# Altium PCB PLACALDR.PcbDoc
Units mm, origin at the board's own origin, x right, y up, seen from the top; angles counter-clockwise.
Board outline 60 x 50 mm, 2 copper layers (Top Layer, Bottom Layer); 18 components, 14 nets, 69 pads, 0 vias.
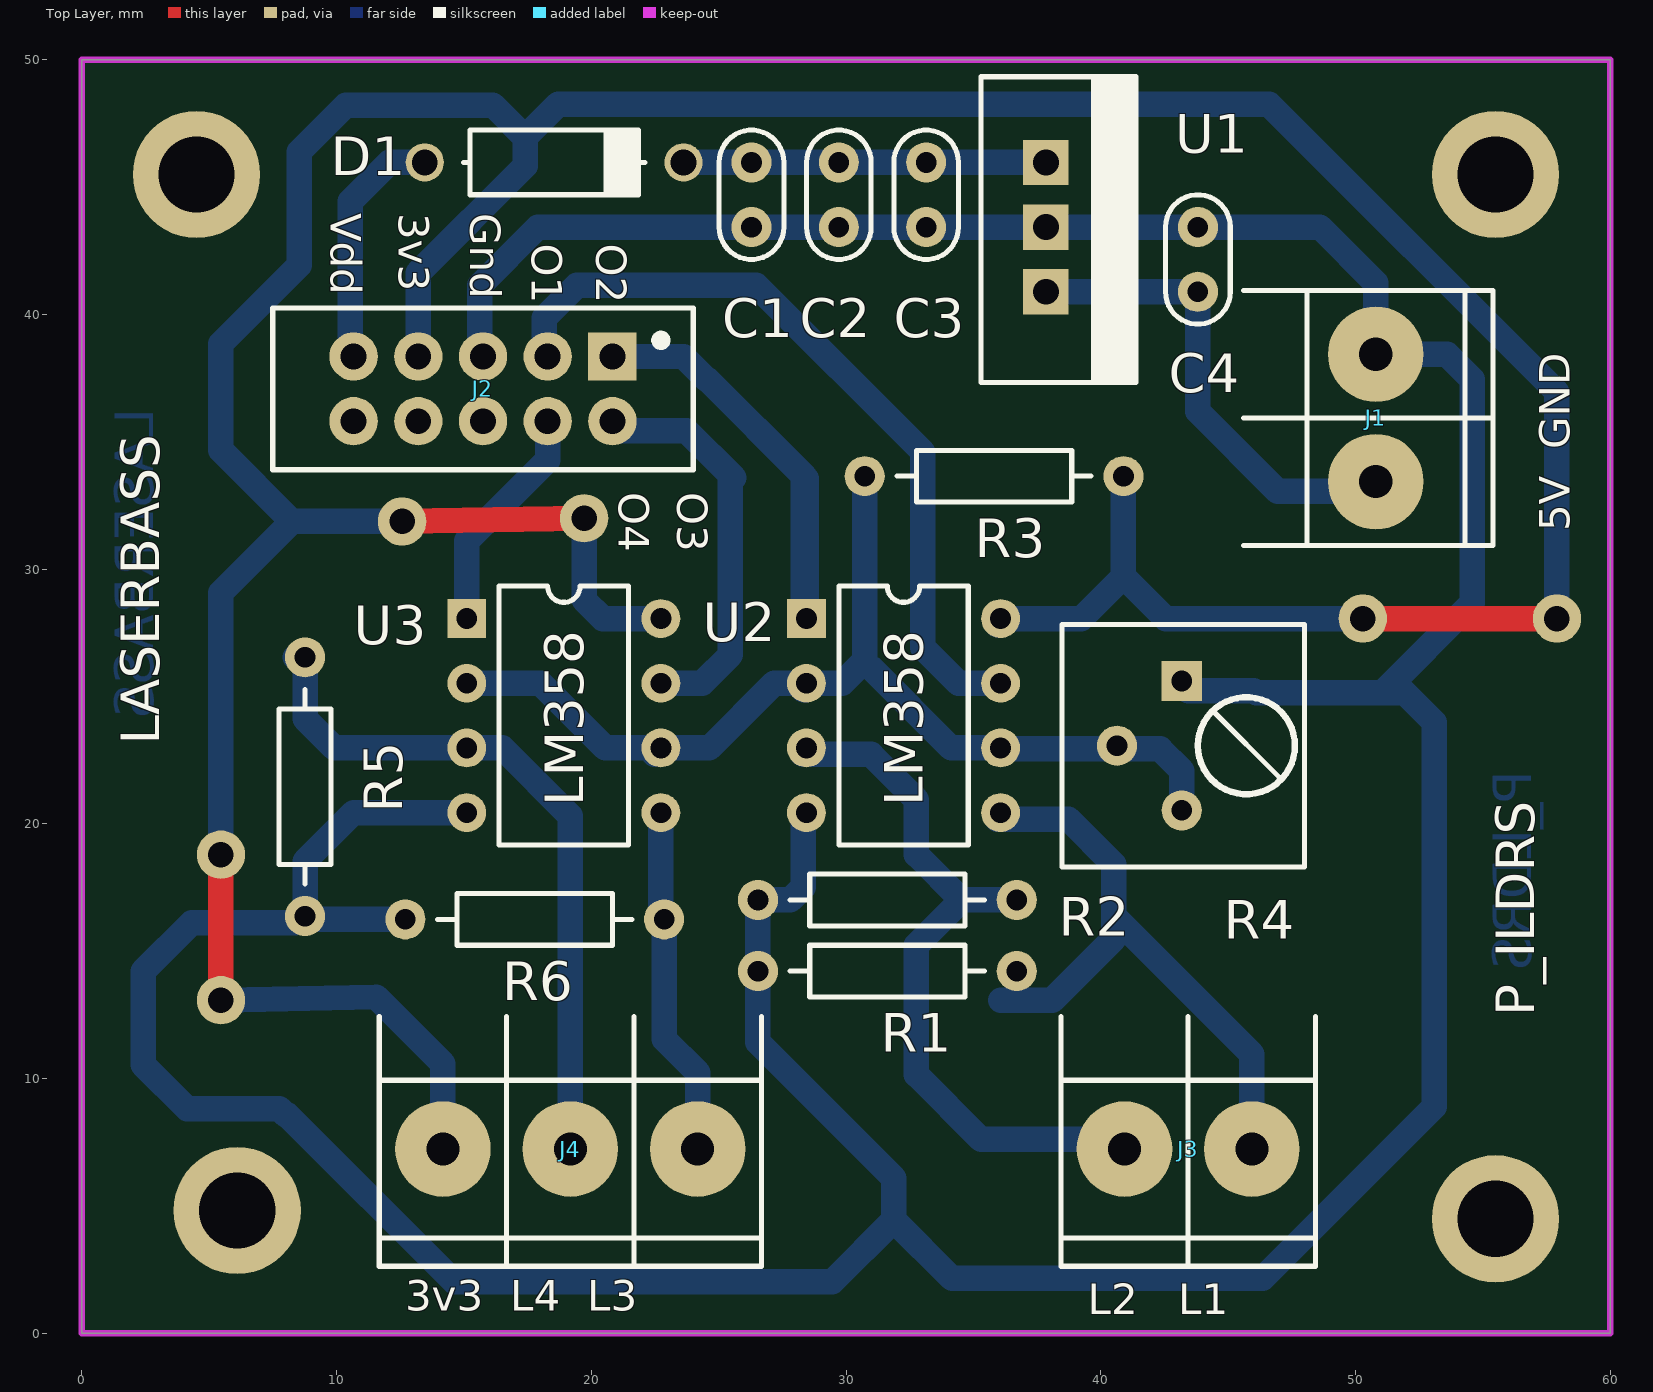
[diagram p0: Top Layer view]
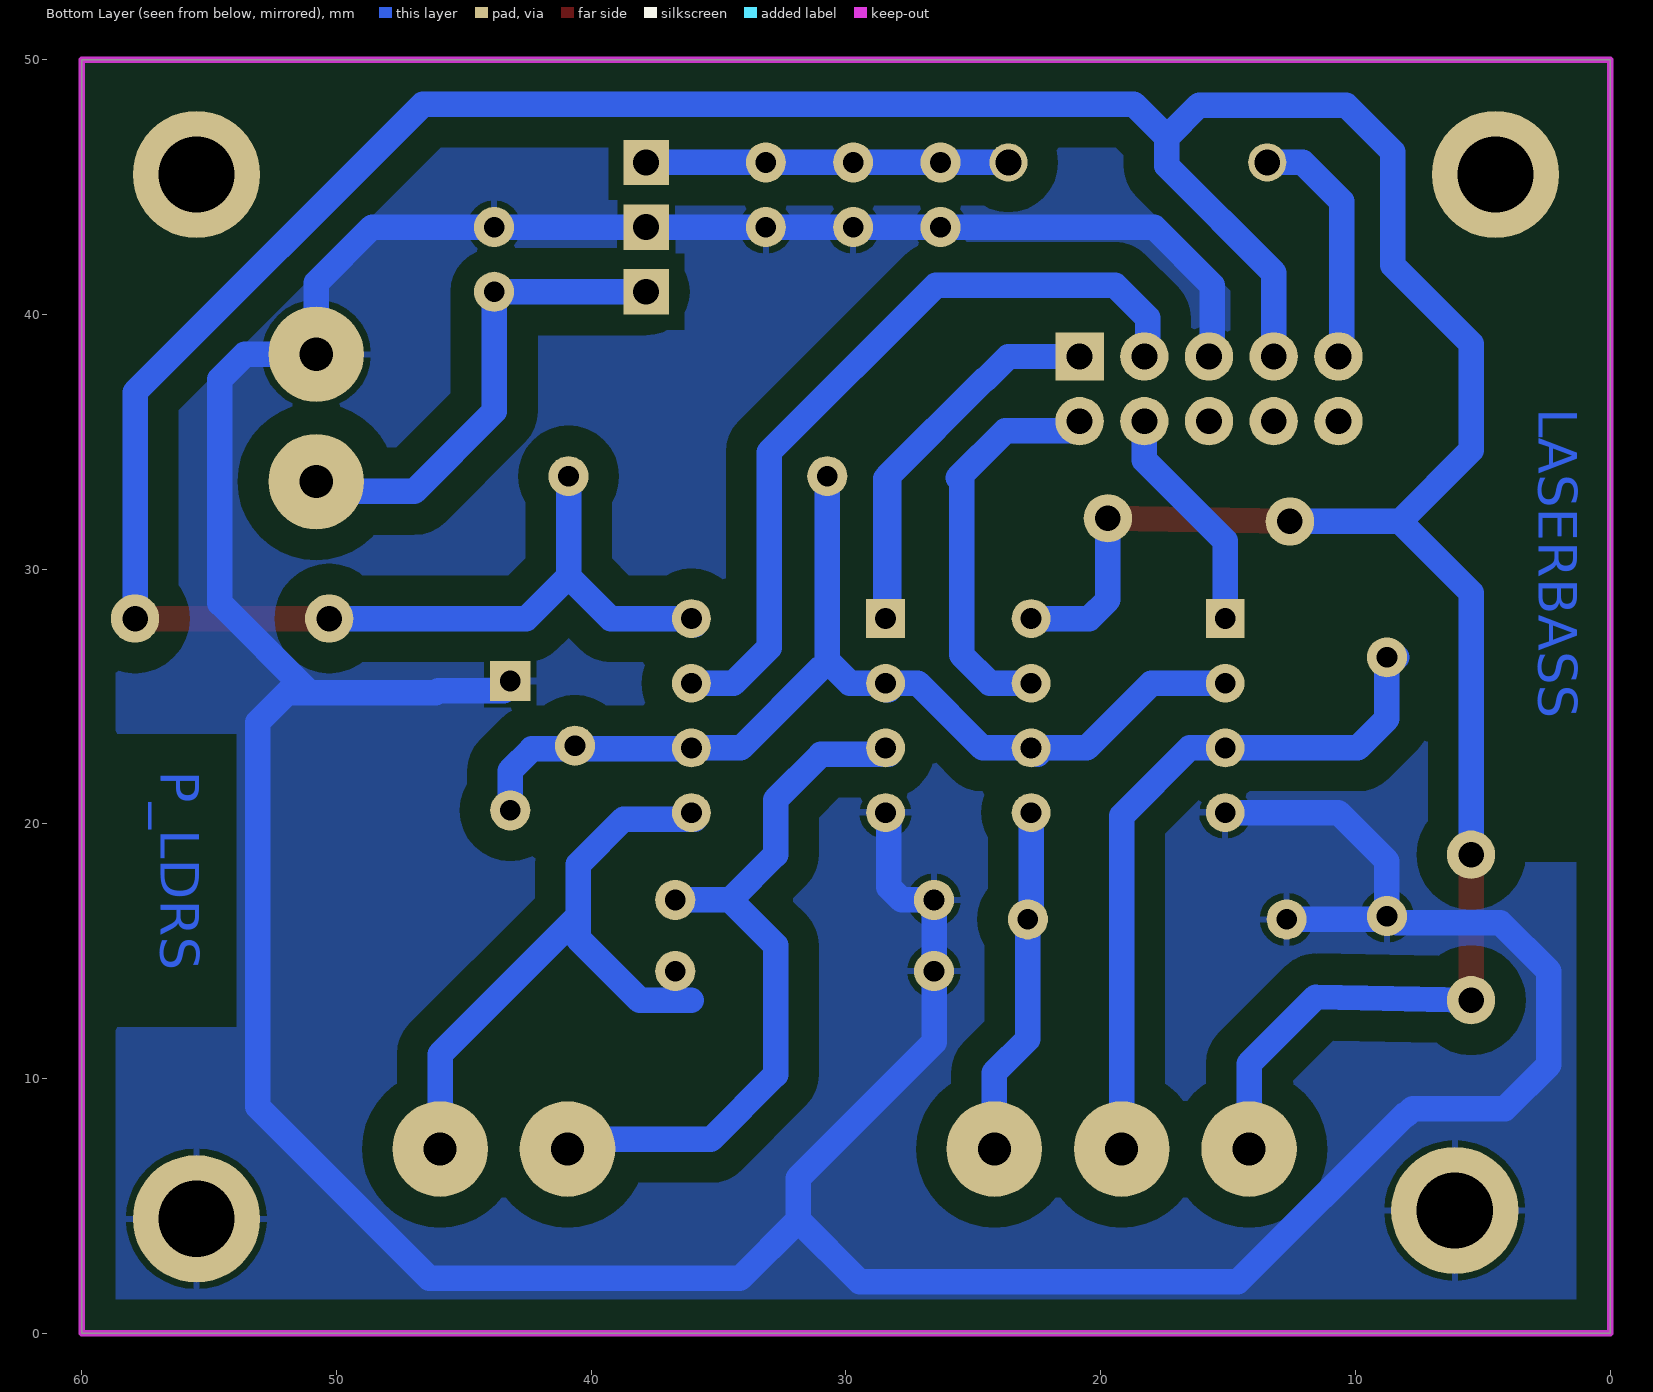
[diagram p1: Bottom Layer view, seen from below]

## Layer stack, top to bottom
Top Solder: solder mask 0.0102, Solder Resist, Dk 3.5
Top Layer: signal copper 0.0356
Dielectric 1: dielectric 0.32, FR-4, Dk 4.8
Bottom Layer: signal copper 0.0356
Bottom Solder: solder mask 0.0102, Solder Resist, Dk 3.5

## Board outline
0,0 60,0 60,50 0,50

## Design rules (kind name [scope] priority, off if disabled: settings)
Clearance Clearance_2 [All vs (InComponent('J2') OR InComponent('U1') OR InComponent('C1')OR InComponent('C2')OR InComponent('C3')OR InComponent('C4'))] p1: gap=0.6
Clearance Clearance_1 [InPolygon] p2: gap=1.2
Clearance [All] p3: gap=1
PolygonConnect [All] p1: connectstyle=Relief reliefconductorwidth=0.254 reliefentries=4 polygonreliefangle="90 Angle" airgapwidth=0.254
RoutingVias [All] p1: holewidth=0.711 width=1.27 viastyle="Through Hole" minholewidth=0.711 minwidth=1.27 maxholewidth=0.711 maxwidth=1.27
SolderMaskExpansion [All] p1: expansion=0.102
Width [All] p1: maxlimit=1.2 minlimit=1 preferedwidth=1
30 further rules are at their usual default settings.

## Classes and differential pairs
component class PLACALDR: C1 C2 C3 C4 D1 J1 J2 J3 J4 R1 R3 R4 R5 R6 U1 U2 U3

## Components (designator, comment, footprint, x,y, rotation, side; value= is the part's Value field where it differs from the comment)
C1 "0.1uF" CAP100 26.289,44.704 r270 top
C2 "0.22uF" CAP100 29.718,44.704 r270 top
C3 "10nF" CAP100 33.147,44.704 r270 top
C4 "100nF" CAP100 43.815,42.164 r90 top
D1 "1N4007" DO41 18.542,45.974 r0 top
J1 "BORNERA 2" BORNERA2 50.8,35.941 r180 top
J2 "CON5*2" SIP5*2 20.828,35.814 r180 top
J3 "BORNERA 2" BORNERA2 43.434,7.239 r90 top
J4 "BORNERA 3" BORNERA3 19.177,7.239 r90 top
R1 "1K" RES400 36.703,14.224 r180 top
R2 "1K" RES400 36.703,17.018 r180 top
R3 "1K" RES400 30.734,33.655 r0 top
R4 "10K" "PRESET H" 43.18,23.114 r270 top
R5 "1K" RES400 8.763,26.543 r270 top
R6 "1K" RES400 22.86,16.256 r180 top
U1 "7805" "TO-220 V" 37.846,43.434 r270 top
U2 "LM358" DIP8 28.448,28.067 r0 top
U3 "LM358" DIP8 15.113,28.067 r0 top

## Footprints (in the part's own frame and the unit in brackets; to place one, negate y for a bottom-side part, rotate by r counter-clockwise, add the part's x,y. Pads: shape width x height; smd on the part's side, far side on the other; paste and mask are expansions set on the pad)
BORNERA2 [mm] "Bornera con Tornillos 5mm separación"
  round 3.75 hole 1.3: 1(0,2.5) 2(0,-2.5)
  silkscreen extent -4.6,-5 5.2,5, body extent -3.76,-4.89 3.94,5.61, height 10
BORNERA3 [mm] "Bornera con Tornillos 5mm separación"
  round 3.75 hole 1.3: 1(0,5) 2(0,0) 3(0,-5)
  silkscreen extent -4.6,-7.5 5.2,7.5, body extent -3.76,-7.39 3.94,8.11, height 10.05
CAP100 [mil]
  round 62 hole 32: 1(-50,0) 2(50,0)
  silkscreen extent -100,-50 100,50, body extent -115,-33 115,34, height 241
DIP8 [mil]
  rect 60x60 hole 32: 1(0,0)
  round 60 hole 32: 2(0,-100) 3(0,-200) 4(0,-300) 5(300,-300) 6(300,-200) 7(300,-100) 8(300,0)
  silkscreen extent 50,-350 250,50, body extent -3,-363 303,63, height 177
DO41 [mm]
  round 1.5 hole 1.016: 1(-5.08,0) 2(5.08,0)
  silkscreen extent -3.56,-1.27 3.56,1.27, body extent -5.46,-1.19 5.46,1.37, height 2.03
"PRESET H" [mil]
  rect 62x62 hole 32: 1(-98.43,0)
  round 62 hole 32: 2(1.57,-100) 3(101.57,0)
  silkscreen extent -186,-185 189,190, body extent -190,-188 185,188, height 197
RES400 [mil]
  round 62 hole 32: 1(0,0) 2(400,0)
  silkscreen extent 50,-40 350,40, body extent -12,-45 412,46, height 96
SIP5*2 [mm]
  rect 1.9x1.9 hole 1.016: 1(0,-2.54)
  round 1.9 hole 1.016: 2(0,0) 3(2.54,-2.54) 4(2.54,0) 5(5.08,-2.54) 6(5.08,0) 7(7.62,-2.54) 8(7.62,0) 9(10.16,-2.54) 10(10.16,0)
  silkscreen extent -3.18,-4.45 13.33,1.9, body extent -1.26,-3.84 11.44,1.24, height 10.1
"TO-220 V" [mil]
  rect 70x70 hole 40: 1(-100,0) 2(0,0) 3(100,0)
  silkscreen extent -232,-100 240,139, body extent -197,-79 197,118, height 709

## Part data
C1 C2 C3 C4: library part CAP
D1: library part DIODO
R1 R2 R3 R5 R6: library part RES
R4: library part PRESET
U1: library part 78XX, "REGULDOR POSITIVO"

## Free pads (board coordinates)
  round 5 hole 3: 0(4.5,45.5) 0(6.096,4.826) 0(55.5,4.5) 0(55.5,45.5)
  round 1.9 hole 1: 0(5.461,13.081) 0(5.461,18.796) 0(12.573,31.877) 0(19.718,32.004) 0(50.292,28.067) 0(57.912,28.067)

## Nets (pads, with @x,y where several pads share a name; then routed paths per layer and width w, separated by ;. In a path a pad name is that pad's centre, name@x,y a point inside that pad or via, vN(x,y) a via of type N, cw(c..) or ccw(c..) an arc to the next point about the centre after c; other vN are vias at no path point)
3.3: J2.7 J4.1 pad.0@5.461,13.081 pad.0@5.461,18.796 pad.0@12.573,31.877 pad.0@19.718,32.004 pad.0@50.292,28.067 pad.0@57.912,28.067 R3.2 U2.8 U3.8 | length 171.1
  Top Layer w1: pad.0@5.461,13.081 pad.0@5.461,18.796 ; pad.0@12.573,31.877 pad.0@19.718,32.004 ; pad.0@50.292,28.067 pad.0@57.912,28.067
  Bottom Layer w1: pad.0@5.207,13.081 5.461,13.086 11.557,13.208 14.177,10.588 J4.1 ; pad.0@5.461,18.669 5.461,18.796 5.461,29.083 8.255,31.877 ; pad.0@12.573,31.877 8.255,31.877 ; J2.7 13.208,41.642 17.399,45.833 17.399,46.962 ; pad.0@19.718,32.004 19.718,28.796 20.447,28.067 U3.8@22.602,28.067 ; U3.8@22.733,27.813 22.63,28.014 U3.8@22.602,28.067 ; U3.8 U3.8@22.602,28.067 ; U2.8@35.941,27.813 U2.8@36.068,27.813 ; U2.8 39.243,28.067 40.894,29.718 ; R3.2 40.894,29.718 ; pad.0@50.292,28.067 42.545,28.067 40.894,29.718 ; pad.0@57.912,28.067 57.912,36.957 46.609,48.26 18.697,48.26 17.399,46.962 ; 8.255,31.877 5.461,34.671 5.461,38.862 8.541,41.942 8.541,46.396 10.369,48.224 16.137,48.224 17.399,46.962
5V: C4.1 J1.1 U1.3 | length 18.8
  Bottom Layer w1: U1.3 C4.1 43.815,36.195 46.95,33.06 J1.1@50.673,33.06
GND: C1.2 C2.2 C3.2 C4.2 J1.2 J2.5 pad.0@6.096,4.826 pad.0@55.5,4.5 R1.2 R2.2 R4.1 R5.2 R6.2 U1.2 U2.4 U3.4 | length 188.6
  Bottom Layer w1: R5.2@8.382,16.129 4.318,16.129 2.413,14.224 2.413,10.541 4.128,8.826 7.753,8.826 7.995,8.584 8.059,8.584 14.611,2.032 29.464,2.032 31.877,4.445 ; R6.2 8.89,16.256 R5.2 8.763,18.542 10.668,20.447 U3.4 ; J2.5@15.621,37.973 15.621,41.148 17.907,43.434 C1.2 C2.2 C3.2 U1.2 C4.2 48.607,43.434 50.8,41.241 J1.2 53.6,38.441 54.578,37.463 54.578,28.67 51.054,25.146 ; U2.4 28.321,20.32 28.321,17.526 27.813,17.018 R2.2 R1.2 26.543,11.43 31.877,6.096 31.877,4.445 ; R4.1@43.434,25.233 46.014,25.233 46.101,25.146 51.054,25.146 ; 31.877,4.445 34.163,2.159 46.355,2.159 53.086,8.89 53.086,24.003 51.943,25.146 51.054,25.146
L1: J3.2 R1.1 U2.5 | length 24.7
  Bottom Layer w1: U2.5@35.941,20.193 38.735,20.193 40.513,18.415 40.513,15.494 38.1,13.081 36.068,13.081 ; 40.513,16.383 45.934,10.962 J3.2@45.934,7.62
L2: J3.1 R2.1 U2.3 | length 28.8
  Bottom Layer w1: U2.3@28.321,22.733 30.988,22.733 32.766,20.955 32.766,18.796 34.544,17.018 ; R2.1 34.544,17.018 ; J3.1@40.934,7.62 35.306,7.62 32.766,10.16 32.766,15.24 34.544,17.018
L3: J4.3 R6.1 U3.5 | length 13.6
  Bottom Layer w1: U3.5@22.733,20.193 22.733,16.383 R6.1 22.86,11.557 24.177,10.24 J4.3
L4: J4.2 R5.1 U3.3 | length 27.9
  Bottom Layer w1: R5.1@8.382,26.543 R5.1 8.763,24.13 9.906,22.987 U3.3 16.51,22.987 19.177,20.32 J4.2
NetC1_1: C1.1 C2.1 C3.1 D1.2 U1.1 | length 13.5
  Bottom Layer w1: D1.2 29.972,45.974 33.528,45.974 U1.1@37.084,45.974
O1: J2.3 U2.7 | length 31.3
  Bottom Layer w1: J2.3@18.161,37.973 18.161,39.878 19.431,41.148 26.476,41.148 33.021,34.602 33.021,26.923 34.417,25.527 U2.7
O2: J2.1 U2.1 | length 21
  Bottom Layer w1: J2.1 23.622,38.354 24.543,37.433 24.577,37.433 28.321,33.689 ; U2.1@28.321,27.813 28.321,33.689 ; U2.1 28.447,28.068 28.447,33.564 28.321,33.689
O3: J2.2 U3.7 | length 15.8
  Bottom Layer w1: J2.2@20.701,35.433 23.749,35.433 25.59,33.591 25.463,33.465 25.463,26.641 24.35,25.527 U3.7
O4: J2.4 U3.1 | length 9.3
  Bottom Layer w1: U3.1@15.113,27.813 U3.1 15.113,31.115 18.288,34.29 J2.4
VDD: D1.1 J2.9 | length 10
  Bottom Layer w1: J2.9@10.541,37.973 10.541,44.45 12.065,45.974 D1.1
VREF: R3.1 R4.2 R4.3 U2.2 U2.6 U3.2 U3.6 | length 41.1
  Bottom Layer w1: U3.2 18.01,25.527 20.55,22.987 U3.6 ; U3.6@22.479,22.733 U3.6 ; U2.2@28.321,25.273 U2.2@28.448,25.273 ; 30.734,26.416 29.845,25.527 U2.2 27.178,25.527 24.638,22.987 U3.6 ; 30.734,26.543 R3.1 ; 31.021,26.094 34.129,22.987 U2.6 36.109,22.946 42.332,22.946 43.18,22.098 R4.3
pads on no net: J2.6 J2.8 J2.10

## Polygon pours and split planes (outlines as drawn)
GND on Bottom Layer "TOP Layer-No Net" (solid, remove dead copper, pour order 2): 0,50 60,50 60,0 0,0 0,50

## Keep-outs
Keep-Out Layer:
  the board outline again, w0.254

## Other copper
Bottom Layer:
  text "LASERBASS" at 2.794,36.322 h1.52 r90
  text "P_LDRS" at 56.896,22.098 h1.52 r90

## Silkscreen, mask and mechanical layers (free items; w line width, h text height)
Top Overlay:
  text "Vdd" at 9.779,43.974 h1.2 r270
  text "3v3" at 12.446,43.974 h1.2 r270
  text "Gnd" at 15.24,43.974 h1.2 r270
  text "O1" at 17.653,42.774 h1.2 r270
  text "O2" at 20.193,42.774 h1.2 r270
  text "O4" at 21.082,33.02 h1.2 r270
  text "O3" at 23.368,33.02 h1.2 r270
  text "5V  GND" at 58.42,31.496 h1.2 r90
  text "LASERBASS" at 3.048,23.114 h1.52 r90
  text "LM358" at 19.685,20.701 h1.52 r90
  text "LM358" at 33.02,20.701 h1.52 r90
  text "P_ILDRS" at 57.023,12.446 h1.52 r90
  text "3v3  L4  L3" at 12.7,0.889 h1.2
  text "L2   L1" at 39.497,0.762 h1.2